# Altium PCB PCB1.PcbDoc
Units mil, origin at the board's own origin, x right, y up, seen from the top; angles counter-clockwise.
Board outline 6000 x 4000 mil, 2 copper layers (Top Layer, Bottom Layer); 4 components, 11 nets, 66 pads, 0 vias.
Unrouted connection lines stored in the file: 5.
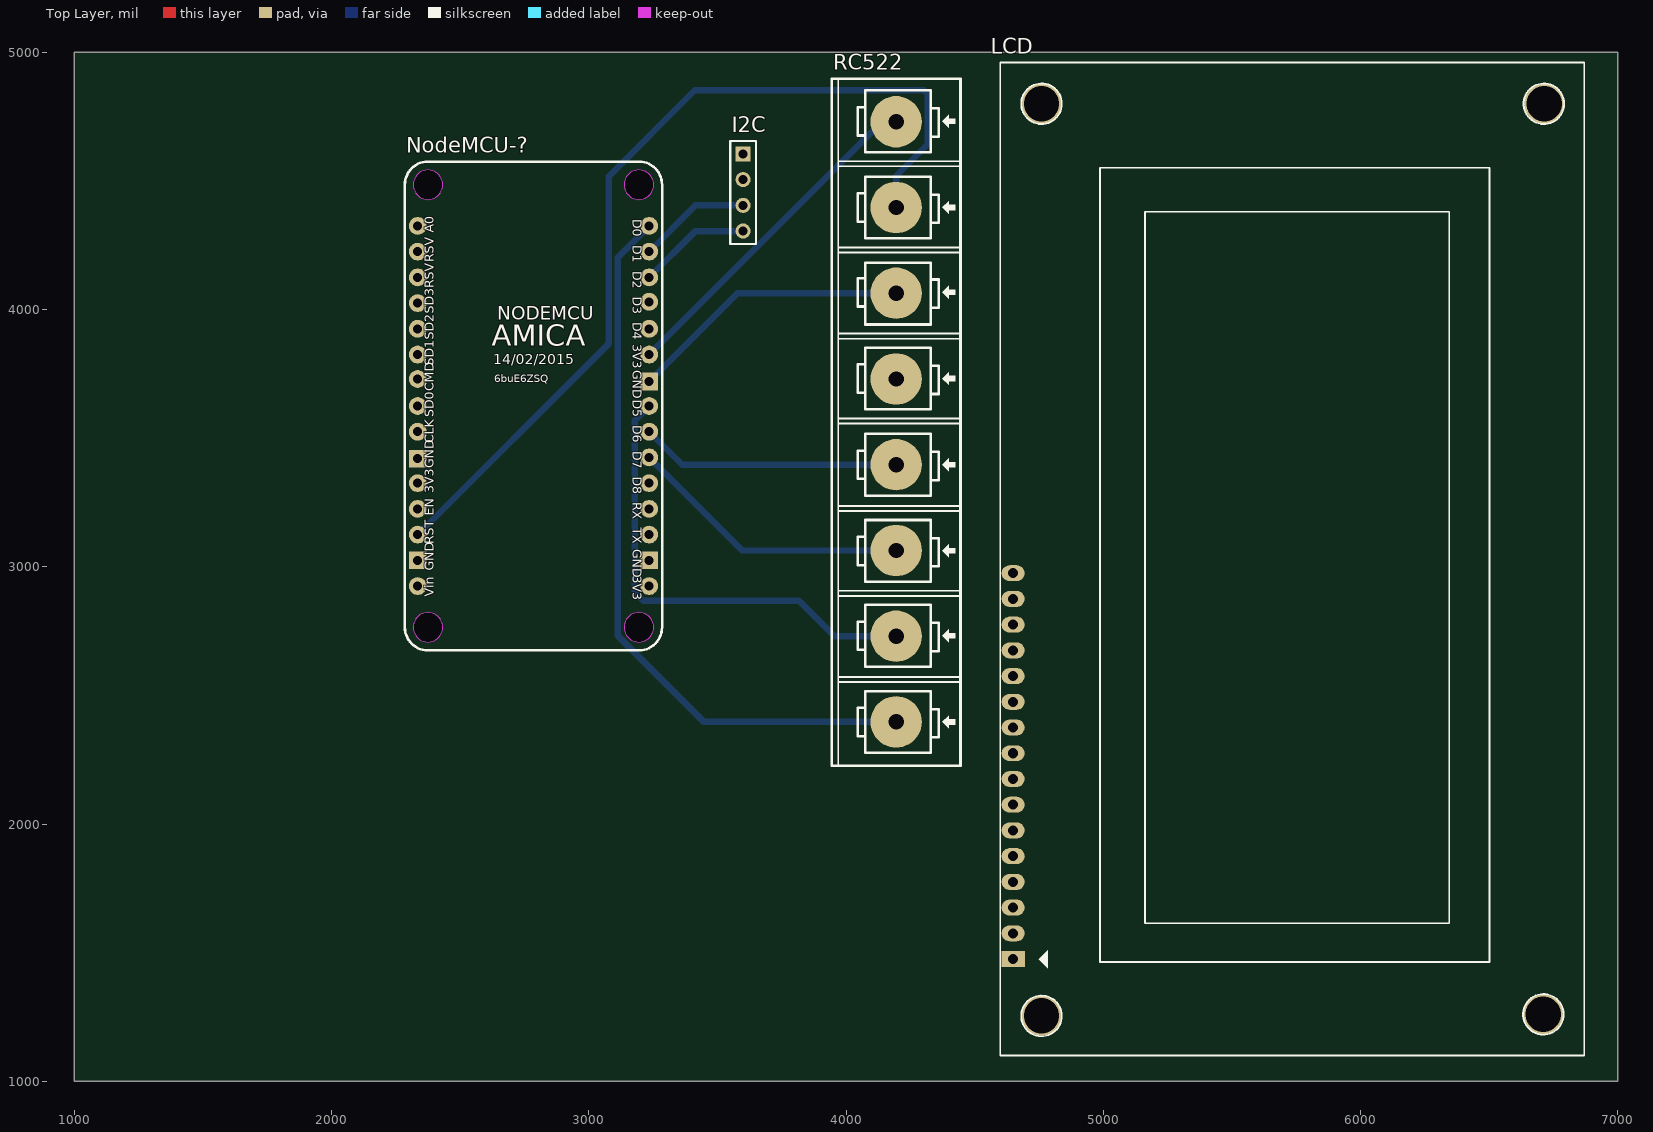
[diagram p0: Top Layer view]
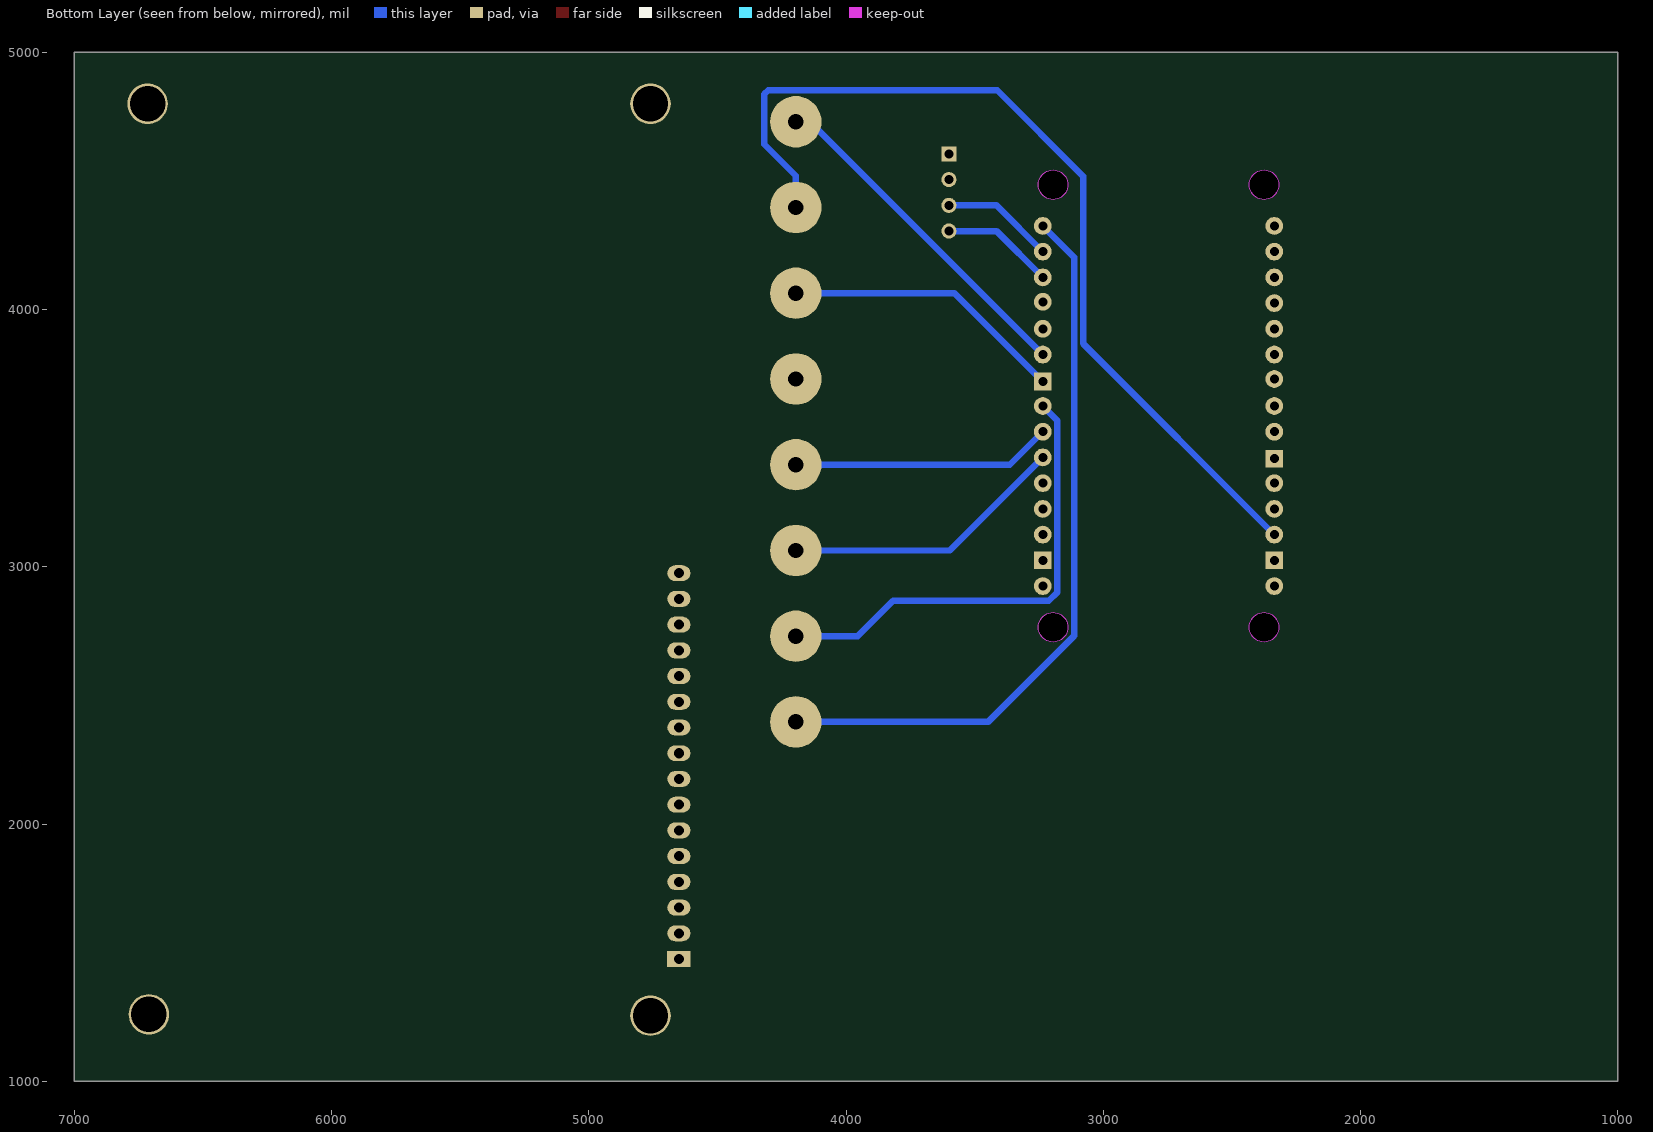
[diagram p1: Bottom Layer view, seen from below]

## Layer stack, top to bottom
Top Solder: solder mask 0.4, Solder Resist, Dk 3.5
Top Layer: signal copper 1.4
Dielectric 1: dielectric 12.6, FR-4, Dk 4.8
Bottom Layer: signal copper 1.4
Bottom Solder: solder mask 0.4, Solder Resist, Dk 3.5

## Board outline
1000,1000 7000,1000 7000,5000 1000,5000

## Design rules (kind name [scope] priority, off if disabled: settings)
Clearance [All] p1: gap=10 ignorepadtopadclearanceinfootprint=FALSE except(0: Arc-Hole Track-Hole SMDPad-Hole THPad-Hole Via-Hole Fill-Hole Poly-Hole Region-Hole Text-Hole)
PolygonConnect [All] p1: connectstyle=Relief reliefconductorwidth=10 reliefentries=4 polygonreliefangle="90 Angle" airgapwidth=10
RoomDefinition Sheet1 [InComponentClass('Sheet1')] p1: confinementstyle=ConfineIn formatcopy=TRUE lockcomponents=FALSE outline 0,0 2000,0 2000,1000 0,1000
RoutingVias [All] p1: holewidth=28 width=50 viastyle="Through Hole" minholewidth=28 minwidth=50 maxholewidth=28 maxwidth=50
SolderMaskExpansion [All] p1: expansion=4
Width [All] p1: maxlimit=25 minlimit=25 preferedwidth=25 minimp=50.000000 maximp=50.000000 favimp=50.000000
30 further rules are at their usual default settings.

## Components (designator, comment, footprint, x,y, rotation, side; value= is the part's Value field where it differs from the comment)
I2C "I2C" HDR1X4 3600,4605 r270 top
LCD "LCD 20x4A" LCD20X4A 4650,1475 r90 top
NodeMCU-? "NodeMCU V1.0 ESP-12E" "NodeMCU V1.0 ESP-12E" 2284,4571 r0 top
RC522 "RC522" HED8V 4195,2396.67 r90 top

## Footprints (in the part's own frame and the unit in brackets; to place one, negate y for a bottom-side part, rotate by r counter-clockwise, add the part's x,y. Pads: shape width x height; smd on the part's side, far side on the other; paste and mask are expansions set on the pad)
HDR1X4 [mm] "Connector; Header; 4 Position"
  rect 1.5x1.5 hole 0.9: 1(0,0)
  round 1.5 hole 0.9: 2(2.54,0) 3(5.08,0) 4(7.62,0)
  silkscreen extent -1.27,-1.27 8.89,1.27
HED8V [mil] "Header 6"
  round 200 hole 60: 1(0,0) 2(333.33,0) 3(666.67,0) 4(1000,0) 5(1333.33,0) 6(1666.67,0) 7(2000,0) 8(2333.33,0)
  silkscreen extent -170,-250 2500,250
LCD20X4A [mil] "LCD dipslay 20x4, 16 pin"
  rect 62x90 hole 39: 1(0,0)
  oval 62x90 hole 39: 2(100,0) 3(200,0) 4(300,0) 5(400,0) 6(500,0) 7(600,0) 8(700,0) 9(800,0) 10(900,0) 11(1000,0) 12(1100,0) 13(1200,0) 14(1300,0) 15(1400,0) 16(1500,0)
  round 157.48 hole 137.8: "Hole 0"(-220,-110) "Hole 0"(-215,-2060) "Hole 0"(3325,-2065) "Hole 0"(3325,-110)
  silkscreen extent -375,-2220 3485,50, body extent -392,-2264 3466,98, height 417
"NodeMCU V1.0 ESP-12E" [mil]
  round 115 hole 115 unplated paste-300 mask-300: 0(91,-1806) 0(91,-86) 0(911,-1806) 0(911,-86)
  round 69 hole 35: 3V3(51,-1246) 3V3(951,-1646) 3V3(951,-746) A0(51,-246) CLK(51,-1046) CMD(51,-841) D0(951,-246) D1(951,-346) D2(951,-446) D3(951,-541) D4(951,-646) D5(951,-946) D6(951,-1046) D7(951,-1146) D8(951,-1246) EN(51,-1346) RST(51,-1446) RSV(51,-446) RSV(51,-346) RX(951,-1346) SD0(51,-946) SD1(51,-746) SD2(51,-646) SD3(51,-546) TX(951,-1446) VIN(51,-1646)
  rect 69x69 hole 35: GND(51,-1546) GND(51,-1151) GND(951,-1546) GND(951,-851)
  Keep-Out Layer circle w2: c911,-1806 r57.5
  Keep-Out Layer circle w2: c91,-1806 r57.5
  Keep-Out Layer circle w2: c911,-86 r57.5
  Keep-Out Layer circle w2: c91,-86 r57.5
  silkscreen extent 1,-1896 1001,4

## Part data
I2C: library part "Header 4", "Header, 4-Pin", LatestRevisionDate=17-Jul-2002, LatestRevisionNote="Re-released for DXP Platform.", Publisher="Altium Limited"
LCD: library part LCD20x4A, "LCD dipslay 20 char, 4 line"
NodeMCU-?: "NodeMCU V1.0 ESP8266 (ESP-12E)"
RC522: library part HED8V, "Header 8 Vit Broad"

## Nets (pads, with @x,y where several pads share a name; then routed paths per layer and width w, separated by ;. In a path a pad name is that pad's centre, name@x,y a point inside that pad or via, vN(x,y) a via of type N, cw(c..) or ccw(c..) an arc to the next point about the centre after c; other vN are vias at no path point)
NetI2C_1: I2C.1
NetI2C_2: I2C.2
NetI2C_3: I2C.3 NodeMCU-?.D1 | length 439.6
  Bottom Layer w25: NodeMCU-?.D1 3415,4405 I2C.3
NetI2C_4: I2C.4 NodeMCU-?.D2 | length 439.6
  Bottom Layer w25: NodeMCU-?.D2 3415,4305 I2C.4
NetNodeMCU-?_3V3: NodeMCU-?.3V3 RC522.8 | length 1334.9
  Bottom Layer w25: NodeMCU-?.3V3@3235,3825 4140,4730 RC522.8
NetNodeMCU-?_D0: NodeMCU-?.D0 RC522.1 | length 2864.5
  Bottom Layer w25: NodeMCU-?.D0 3113.3,4203.3 3113.3,2731.16 3447.79,2396.67 RC522.1
NetNodeMCU-?_D5: NodeMCU-?.D5 RC522.2 | length 1835.2
  Bottom Layer w25: NodeMCU-?.D5 3178,3568 3178,2901.39 3211.39,2868 3817,2868 3955,2730 RC522.2
NetNodeMCU-?_D6: NodeMCU-?.D6 RC522.4 | length 1013.2
  Bottom Layer w25: NodeMCU-?.D6 3363.33,3396.67 RC522.4
NetNodeMCU-?_D7: NodeMCU-?.D7 RC522.3 | length 1109.8
  Bottom Layer w25: NodeMCU-?.D7 3596.67,3063.33 RC522.3
NetNodeMCU-?_GND: NodeMCU-?.GND RC522.6 | length 1102.2
  Bottom Layer w25: NodeMCU-?.GND@3235,3720 3578.33,4063.33 RC522.6
NetNodeMCU-?_RST: NodeMCU-?.RST RC522.7 | length 3576.6
  Bottom Layer w25: NodeMCU-?.RST 3078.3,3868.3 3078.3,4518.3 3412.5,4852.5 4302.5,4852.5 4317.5,4837.5 4317.5,4642.91 4195,4520.41 RC522.7
pads on no net: "LCD.Hole 0" LCD.1 LCD.2 LCD.3 LCD.4 LCD.5 LCD.6 LCD.7 LCD.8 LCD.9 LCD.10 LCD.11 LCD.12 LCD.13 LCD.14 LCD.15 LCD.16 NodeMCU-?.0 NodeMCU-?.A0 NodeMCU-?.CLK NodeMCU-?.CMD NodeMCU-?.D3 NodeMCU-?.D4 NodeMCU-?.D8 NodeMCU-?.EN NodeMCU-?.RSV NodeMCU-?.RX NodeMCU-?.SD0 NodeMCU-?.SD1 NodeMCU-?.SD2 NodeMCU-?.SD3 NodeMCU-?.TX NodeMCU-?.VIN RC522.5

## Text inside footprints (layer, text, board x,y; h text height)
NodeMCU-?: Top Overlay "14/02/2015" at 2629,3773 h69; Top Overlay "AMICA" at 2623,3832 h140; Top Overlay "NODEMCU" at 2644,3942 h90; Top Overlay "6buE6ZSQ" at 2633,3718 h30; Top Overlay "CLK" at 2410,3481 h60 r90; Top Overlay "SD0" at 2410,3581.43 h60 r90; Top Overlay "SD1" at 2410,3782.29 h60 r90; Top Overlay "SD2" at 2410,3882.71 h60 r90; Top Overlay "SD3" at 2410,3983.14 h60 r90; Top Overlay "RSV" at 2410,4083.57 h60 r90; Top Overlay "RSV" at 2410,4184 h60 r90; Top Overlay "A0" at 2410,4298 h60 r90; Top Overlay "D5" at 3160,3650 h60 r270; Top Overlay "GND" at 3160,3764 h60 r270; Top Overlay "3V3" at 3160,3865.99 h60 r270; Top Overlay "D4" at 3160,3951 h60 r270; Top Overlay "D3" at 3160,4049.42 h60 r270; Top Overlay "D2" at 3160,4149.42 h60 r270; Top Overlay "D1" at 3160,4249.65 h60 r270; Top Overlay "D0" at 3160,4351 h60 r270; Top Overlay "CMD" at 2410,3681.86 h60 r90; Top Overlay "D6" at 3160,3550.88 h60 r270; Top Overlay "3V3" at 3160,2965 h60 r270; Top Overlay "GND" at 3160,3068.8 h60 r270; Top Overlay "TX" at 3160,3152 h60 r270; Top Overlay "RX" at 3160,3250.94 h60 r270; Top Overlay "D8" at 3160,3349.89 h60 r270; Top Overlay "D7" at 3160,3449.77 h60 r270; Top Overlay "Vin" at 2410,2884 h60 r90; Top Overlay "GND" at 2410,2984 h60 r90; Top Overlay "RST" at 2410,3087 h60 r90; Top Overlay "EN" at 2410,3199 h60 r90; Top Overlay "3V3" at 2410,3286 h60 r90; Top Overlay "GND" at 2410,3383 h60 r90